# Altium PCB PCB1.PcbDoc
Units mm, origin at the board's own origin, x right, y up, seen from the top; angles counter-clockwise.
Board outline 152.4 x 101.6 mm, 2 copper layers (Top Layer, Bottom Layer); 18 components, 24 nets, 88 pads, 0 vias.
Unrouted connection lines stored in the file: 11.
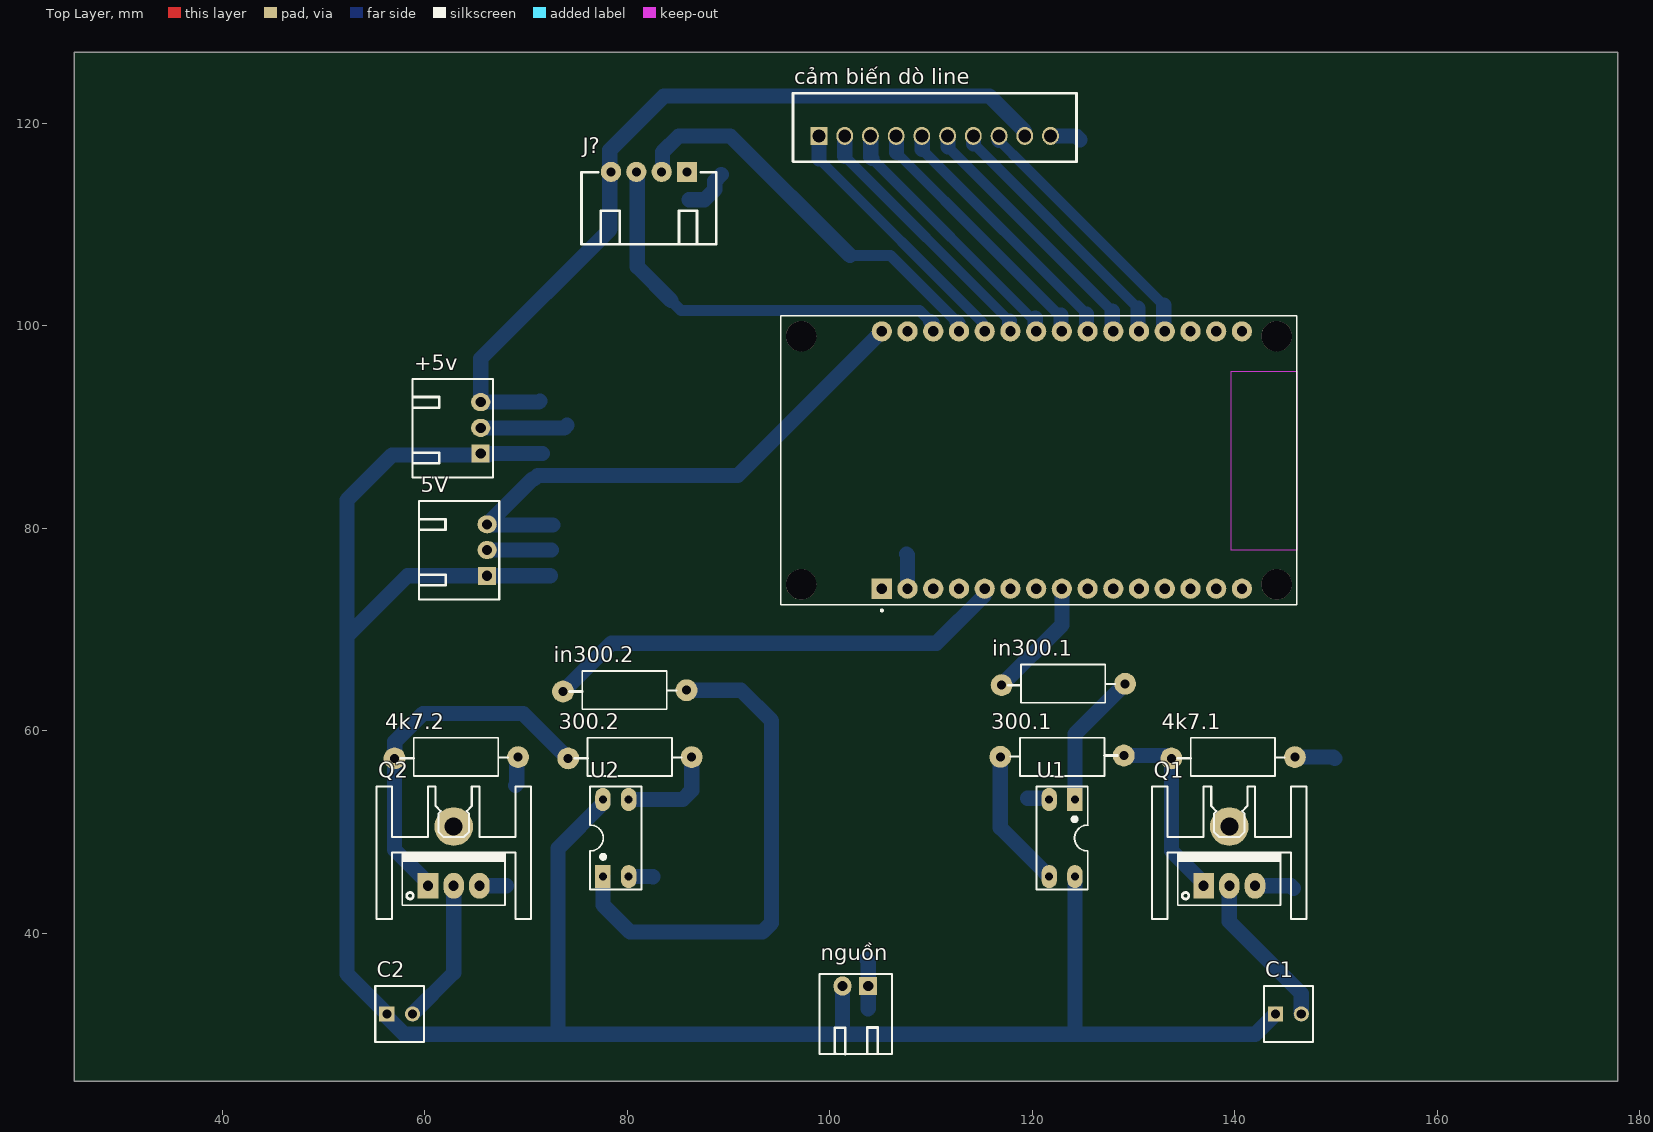
[diagram p0: Top Layer view]
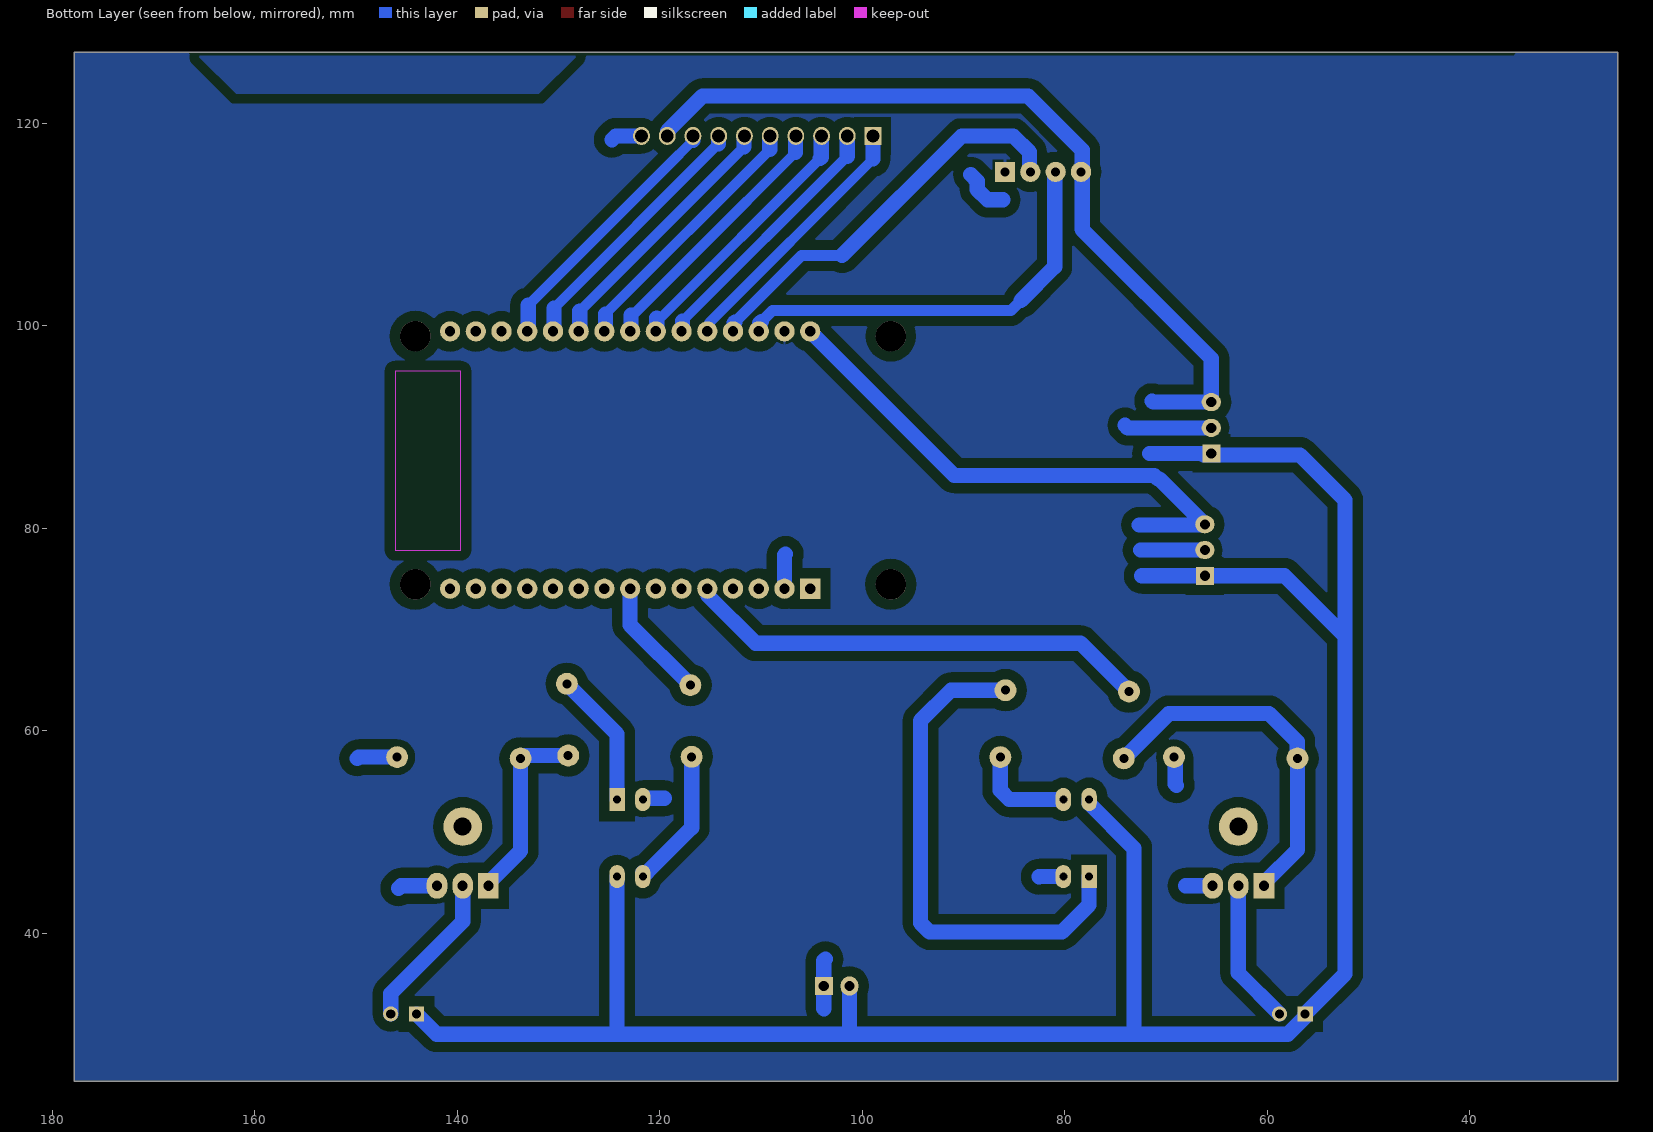
[diagram p1: Bottom Layer view, seen from below]
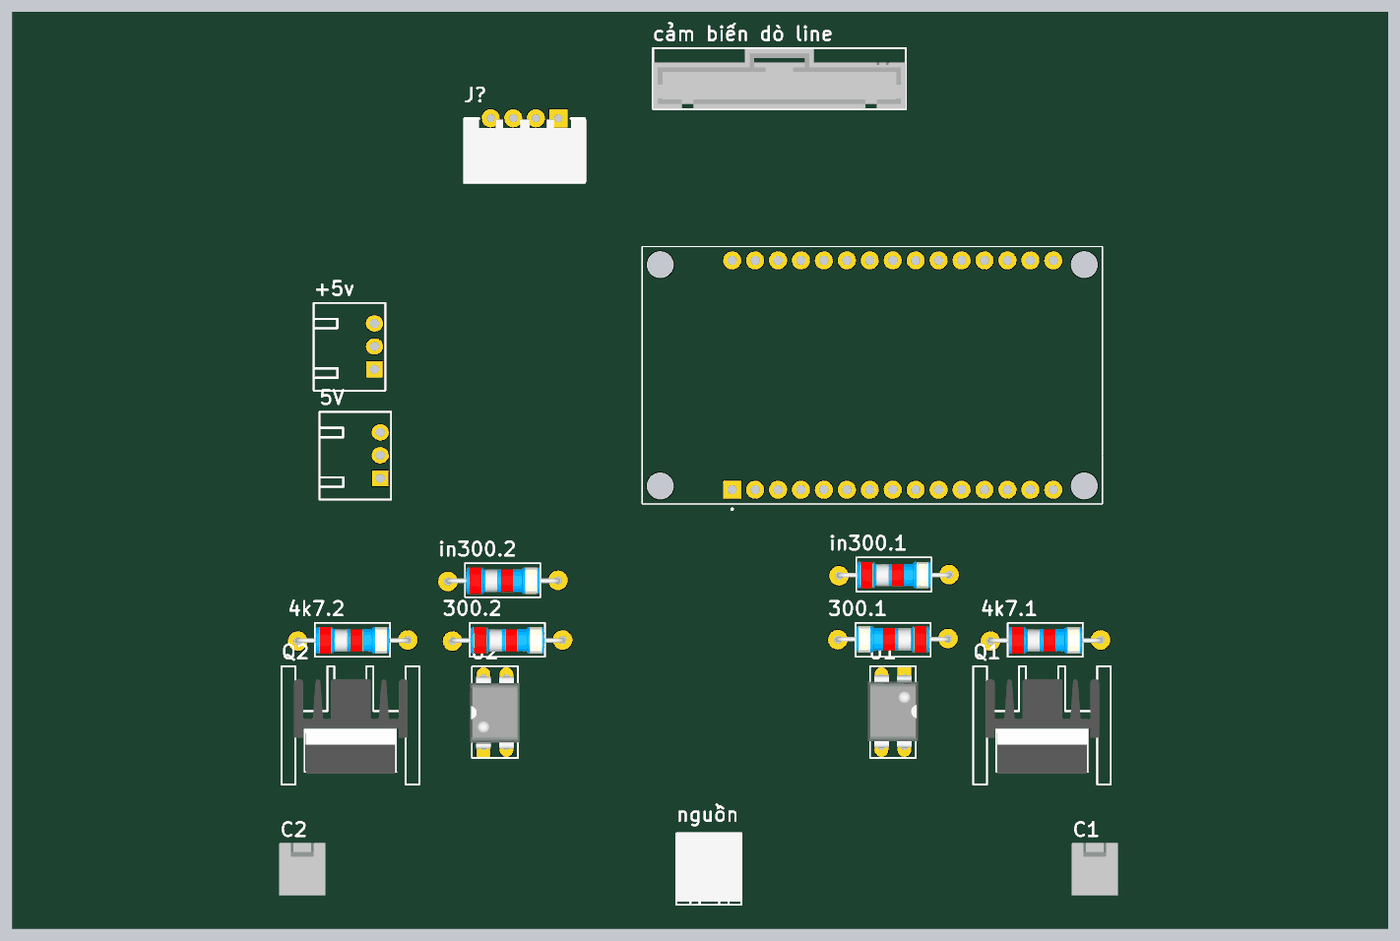
[diagram p2: 3D render of the assembled board from above, using the file's embedded part models]

## Layer stack, top to bottom
Top Solder: solder mask 0.0102, Solder Resist, Dk 3.5
Top Layer: signal copper 0.0356
Dielectric 1: dielectric 0.32, FR-4, Dk 4.8
Bottom Layer: signal copper 0.0356
Bottom Solder: solder mask 0.0102, Solder Resist, Dk 3.5

## Board outline
25.4,25.4 177.8,25.4 177.8,127 25.4,127

## Design rules (kind name [scope] priority, off if disabled: settings)
Clearance [All] p1: gap=1 ignorepadtopadclearanceinfootprint=FALSE
PolygonConnect [All] p1: connectstyle=Relief reliefconductorwidth=0.254 reliefentries=4 polygonreliefangle="90 Angle" airgapwidth=0.254
RoutingVias [All] p1: holewidth=0.711 width=1.27 viastyle="Through Hole" minholewidth=0.711 minwidth=1.27 maxholewidth=0.711 maxwidth=1.27
SolderMaskExpansion [All] p1: expansion=0.102 istentingtop=FALSE
Width [All] p1: maxlimit=2 minlimit=1 preferedwidth=1
30 further rules are at their usual default settings.

## Classes and differential pairs
component class control: 300.1 300.2 C1 C2 "cảm biến dò line" in300.1 in300.2 J? Q1 Q2

## Components (designator, comment, footprint, x,y, rotation, side; value= is the part's Value field where it differs from the comment)
4k7.1 "Res" RES-1/2W 139.319,57.404 r0 top
4k7.2 "Res" RES-1/2W 62.611,57.404 r0 top
5V "L7805cv" "Header_Duc Cong_3P 2.54" 66.167,75.311 r270 top
300.1 "Res" RES-1/2W 123.444,57.434 r180 top
300.2 "Res" RES-1/2W 79.756,57.404 r0 top
+5v "L7805cv" "Header_Duc Cong_3P 2.54" 65.532,87.376 r270 top
C1 "Header2" HDR2 144.018,32.049 r0 top
C2 "Header2" HDR2 56.261,32.049 r0 top
"cảm biến dò line" "Header 1_2.54_10P" "Header_Duc Thang_10P_2.54" 98.933,118.745 r90 top
in300.1 "Res" RES-1/2W 122.555,64.643 r0 top
in300.2 "Res" RES-1/2W 79.248,64.008 r0 top
J? "Header 1_2.54_4P" "Header_Duc Cong_4P 2.54" 85.874,115.164 r270 top
nguồn "Header 1_2.54_2P" "Header_Duc Cong_2P 2.54" 103.796,34.798 r0 top
Q1 "IRF540" TO220H1 139.446,44.704 r0 top value=IRF840
Q2 "IRF540" TO220H1 62.865,44.704 r0 top value=IRF840
U1 "PC817" DIP4 124.206,53.226 r180 top
U2 "PC817" DIP4 77.597,45.606 r0 top
? "ESP32-DEVKIT-V1" MODULE_ESP32_DEVKIT_V1 120.65,86.741 r90 top

## Footprints (in the part's own frame and the unit in brackets; to place one, negate y for a bottom-side part, rotate by r counter-clockwise, add the part's x,y. Pads: shape width x height; smd on the part's side, far side on the other; paste and mask are expansions set on the pad)
DIP4 [mil]
  rect 60x90 hole 31: 1(0,0)
  oval 60x90 hole 31: 2(100,0) 3(100,300) 4(0,300)
  silkscreen extent -50,-50 150,350, body extent -59,-10 159,305, height 170
HDR2 [mm] "Connector; Header; 2 Position"
  rect 1.5x1.5 hole 0.9: 1(0,0)
  round 1.5 hole 0.9: 2(2.54,0)
  silkscreen extent -1.14,-2.79 3.68,2.77, body extent -1.27,-2.92 3.81,2.88, height 11.72
"Header_Duc Cong_2P 2.54" [mil]
  rect 70x70 hole 39.37 unplated: 1(0,0)
  oval 70x75 hole 39.37 unplated: 2(-100,0)
  silkscreen extent -190,-265 93,47, body extent -190,-250 90,50, height 237
"Header_Duc Cong_3P 2.54" [mil]
  rect 70x70 hole 39.37 unplated: 1(0,0)
  oval 70x75 hole 39.37 unplated: 2(-100,0) 3(-200,0)
  silkscreen extent -290,-265 93,47
"Header_Duc Cong_4P 2.54" [mil]
  rect 78.74x78.74 hole 35: 1(-1,1)
  round 78.74 hole 35: 2(-1,-97.42) 3(-1,-195.85) 4(-1,-294.28)
  silkscreen extent 0,-409 280,115, body extent 5,-413 278,123, height 290
"Header_Duc Thang_10P_2.54" [mil]
  rect 70x65 hole 50: 1(0,0)
  oval 70x65 hole 50: 2(0,-100) 3(0,-200) 4(0,-300) 5(0,-400) 6(0,-500) 7(0,-600) 8(0,-700) 9(0,-800) 10(0,-900)
  silkscreen extent -101,-1001 165,101, body extent -98,-1000 162,100, height 550
MODULE_ESP32_DEVKIT_V1 [mm]
  rect 2x2 / inner round 2 / far side rect 2x2 hole 1.02: 1(-12.7,15.515)
  round 2 hole 1.02: 2(-12.7,12.975) 3(-12.7,10.435) 4(-12.7,7.895) 5(-12.7,5.355) 6(-12.7,2.815) 7(-12.7,0.275) 8(-12.7,-2.265) 9(-12.7,-4.805) 10(-12.7,-7.345) 11(-12.7,-9.885) 12(-12.7,-12.425) 13(-12.7,-14.965) 14(-12.7,-17.505) 15(-12.7,-20.045) 16(12.7,-20.045) 17(12.7,-17.505) 18(12.7,-14.965) 19(12.7,-12.425) 20(12.7,-9.885) 21(12.7,-7.345) 22(12.7,-4.805) 23(12.7,-2.265) 24(12.7,0.275) 25(12.7,2.815) 26(12.7,5.355) 27(12.7,7.895) 28(12.7,10.435) 29(12.7,12.975) 30(12.7,15.515)
  round 3 hole 3 unplated: ""(-12.28,23.475) ""(-12.28,-23.475) ""(12.23,23.475) ""(12.23,-23.475)
  Keep-Out Layer region: 8.78,-25.475 -8.91,-25.475 -8.91,-18.985 8.78,-18.985
  Keep-Out Layer region: 8.78,-25.475 -8.91,-25.475 -8.91,-18.985 8.78,-18.985
  silkscreen extent -14.95,-25.48 14.23,25.48
RES-1/2W [mil]
  round 85 hole 35: 1(-220,-5) 2(260,0)
  silkscreen extent -195,-74 221,75, body extent -230,-60 270,56, height 121
TO220H1 [mil] "TO-220 - 1-2-3"
  round 150 hole 70: 0(0,230)
  rect 80x100 hole 39: 1(-100,0)
  oval 80x100 hole 39: 2(0,0) 3(100,0)
  silkscreen extent -300,-130 300,385, body extent -246,-82 250,329, height 1000

## Part data
4k7.1 4k7.2 300.1 300.2 in300.1 in300.2: Manufacturer="Generic Components", Class=Passive, Published=08/06/2000, Publisher="Altium Hobart Technology Centre", SubClass=R
5V +5v: library part "Header 1_2.54_3P", "Cắm", Chung_Loai=Cắm
C1 C2: "Header IDC, 2 x 1 Pin Vertical 2.54mm Pitch (Non-Boxed, Male)", Manufacturer="W¨¹rth Elektronik eiSos GmbH", partNo=613002143121, ComponentLink1 Description=Manufacturer, ComponentLink1URL=http://www.we-online.com, ComponentLink2 Description=Datasheet, ComponentLink2URL=http://katalog.we-online.de/em/datasheet/6130xx143121.pdf, Created by="Karrer Zheng", Created Date="29 March 2013", NoPins=02
"cảm biến dò line" J? nguồn: "Cắm", Chung_Loai=Cắm
  "cảm biến dò line": Don_Vi=Con
Q1 Q2: library part IRF840, "MOSFET N - CHANNEL 500V - 0.75 - 8A - TO-220"
U1 U2: "Single Opto"
?: "Dual core, Wi-Fi: 2.4 GHz up to 150 Mbits/s,BLE (Bluetooth Low Energy) and legacy Bluetooth, 32 bits, Up to 240 MHz", Package=None, Availability="Not in stock", Check_prices=https://www.snapeda.com/parts/ESP32-DEVKIT-V1/Do+it/view-part/?ref=eda, MF="Do it", MP=ESP32-DEVKIT-V1, Price=None, SnapEDA_Link=https://www.snapeda.com/parts/ESP32-DEVKIT-V1/Do+it/view-part/?ref=snap

## Nets (pads, with @x,y where several pads share a name; then routed paths per layer and width w, separated by ;. In a path a pad name is that pad's centre, name@x,y a point inside that pad or via, vN(x,y) a via of type N, cw(c..) or ccw(c..) an arc to the next point about the centre after c; other vN are vias at no path point)
+12: 5V.1 +5v.1 C1.1 C2.1 nguồn.2 U1.4 U2.4 | length 231.8
  Bottom Layer w1: 128.651,30.176 128.778,30.049
  Bottom Layer w1.5: +5v.1 71.628,87.376 ; +5v.1@66.294,87.249 56.769,87.249 52.324,82.804 52.324,69.342 ; 72.39,75.311 5V.1 58.293,75.311 52.324,69.342 ; U2.4 77.597,52.845 73.152,48.4 73.152,30.176 73.025,30.049 ; 101.256,30.226 nguồn.2 ; U1.4 124.206,30.049 ; C1.1 142.018,30.049 128.778,30.049 124.206,30.049 ; 52.324,69.342 52.324,35.986 C2.1 56.261,31.76 57.973,30.049 73.025,30.049 ; 73.025,30.049 124.206,30.049
GND: 4k7.1.2 4k7.2.2 5V.2 "cảm biến dò line.10" +5v.2 ?.29 J?.1 nguồn.1 Q1.3 Q2.3 U1.2 U2.2 | length 41.5
  Bottom Layer w1.5: Q2.3 68.072,44.704 ; +5v.2 73.787,89.916 74.041,90.17 ; 5V.2 72.517,77.851 ; 68.961,54.61 69.089,54.738 69.089,57.278 4k7.2.2 ; U2.2 82.537,45.606 82.55,45.593 ; 103.632,37.465 103.796,37.301 nguồn.1 103.796,32.585 103.759,32.549 ; 119.507,53.34 121.655,53.34 121.666,53.329 U1.2 ; 121.793,118.745 124.333,118.745 124.714,118.364 ; Q1.3@141.986,44.958 Q1.3 145.542,44.704 145.796,44.45 ; 4k7.1.2 149.733,57.404 149.86,57.277
Net4k7.1_1: 4k7.1.1 300.1.1 Q1.1 | length 18.7
  Bottom Layer w1.5: 300.1.1 133.268,57.561 133.553,57.277 4k7.1.1 133.731,48.133 136.906,44.958 Q1.1
Net4k7.2_1: 4k7.2.1 300.2.1 Q2.1 | length 35.7
  Bottom Layer w1.5: Q2.1 60.325,44.958 57.023,48.26 4k7.2.1 57.052,57.306 57.052,58.957 59.817,61.722 69.723,61.722 300.2.1
Net5V_3: 5V.3 ?.30 | length 53.4
  Bottom Layer w1.5: 72.644,80.338 66.22,80.338 5V.3 70.632,84.856 70.8,84.856 71.161,85.217 90.911,85.217 ?.30
"Net220 u.1_2": "cảm biến dò line.9" +5v.3 J?.4 | length 81.2
  Bottom Layer w1.5: 71.394,92.583 71.267,92.456 +5v.3 65.532,96.774 78.279,109.521 78.279,115.189 78.279,117.348 83.613,122.682 115.775,122.682 119.224,119.233 119.224,118.774 119.253,118.745
Net300.1_2: 300.1.2 U1.3 | length 14
  Bottom Layer w1.5: 300.1.2 116.84,50.432 121.28,45.991 121.655,45.991 121.666,45.98 U1.3
Net300.2_2: 300.2.2 U2.3 | length 9.9
  Bottom Layer w1.5: U2.3 85.481,53.226 86.36,54.104 300.2.2
Net_5: ?.5 in300.2.1 | length 46.2
  Bottom Layer w1.5: in300.2.1 78.434,68.655 110.551,68.655 115.199,73.303 115.199,73.945 ?.5
Net_8: ?.8 in300.1.1 | length 12
  Bottom Layer w1.5: in300.1.1 122.915,70.464 ?.8
Net_19: "cảm biến dò line.8" ?.19 | length 26.1
  Bottom Layer w1: 116.713,118.286 119.308,115.691 132.979,102.02
  Bottom Layer w1.5: 116.713,118.286 116.713,118.745 ; 132.979,102.02 132.979,99.537 ?.19
Net_20: "cảm biến dò line.7" ?.20 | length 26.1
  Bottom Layer w1: 114.202,117.969 130.439,101.732
  Bottom Layer w1.5: 114.173,118.745 114.202,118.716 114.202,117.969 ; 130.439,101.732 130.439,99.537 ?.20
Net_21: "cảm biến dò line.6" ?.21 | length 26.1
  Bottom Layer w1: 111.662,117.681 127.899,101.443
  Bottom Layer w1.5: 111.633,118.745 111.662,118.716 111.662,117.681 ; 127.899,101.443 127.899,99.537 ?.21
Net_22: "cảm biến dò line.5" ?.22 | length 26.1
  Bottom Layer w1: 109.122,117.392 125.359,101.155
  Bottom Layer w1.5: 109.093,118.745 109.122,118.716 109.122,117.392 ; 125.359,101.155 125.359,99.537 ?.22
Net_23: "cảm biến dò line.4" ?.23 | length 26.2
  Bottom Layer w1: 106.582,117.104 115.995,107.691 122.642,101.044 122.819,101.044
  Bottom Layer w1.5: 106.553,118.745 106.582,118.716 106.582,117.104 ; 122.819,101.044 122.819,99.537 ?.23
Net_24: "cảm biến dò line.3" ?.24 | length 26.3
  Bottom Layer w1: 104.157,116.524 119.926,100.755 120.279,100.755
  Bottom Layer w1.5: 104.013,118.745 104.042,118.716 104.042,116.639 104.157,116.524 ; 120.279,100.755 120.279,99.537 ?.24
Net_25: "cảm biến dò line.2" ?.25 | length 26.1
  Bottom Layer w1: 101.473,116.733 117.739,100.467
  Bottom Layer w1.5: 101.473,116.733 101.473,118.745 ; 117.739,100.467 117.739,99.537 ?.25
Net_26: "cảm biến dò line.1" ?.26 | length 26.1
  Bottom Layer w1: 98.933,116.459 115.104,100.288 115.104,99.632 ?.26
  Bottom Layer w1.5: 98.933,116.459 98.933,118.745
Net_27: ?.27 J?.2 | length 40.3
  Bottom Layer w1.1: 101.981,106.934 105.983,106.934 ?.27@112.555,100.362
  Bottom Layer w1.5: J?.2 83.495,115.285 83.495,117.15 85.09,118.745 90.17,118.745 101.981,106.934 ; ?.27@112.555,100.362 112.659,100.258 112.659,99.537 ?.27
Net_28: ?.28 J?.3 | length 41.7
  Bottom Layer w1.1: 84.328,102.489 85.296,101.521 108.851,101.521 109.959,100.413
  Bottom Layer w1.5: J?.3 80.995,115.093 80.995,105.822 84.328,102.489 ; 109.959,100.413 110.119,100.252 110.119,99.537 ?.28
NetC1_2: C1.2 Q1.2 | length 15.6
  Bottom Layer w1.5: Q1.2 139.446,41.184 146.558,34.072 C1.2
NetC2_2: C2.2 Q2.2 | length 14.4
  Bottom Layer w1: C2.2 C2.2@58.801,32.098
  Bottom Layer w1.5: C2.2 62.865,36.113 Q2.2
Netin300.1_2: in300.1.2 U1.1 | length 13.5
  Bottom Layer w1.5: U1.1 124.206,59.69 in300.1.2
Netin300.2_2: in300.2.2 U2.1 | length 50.5
  Bottom Layer w1.5: U2.1 77.609,45.594 77.609,42.787 80.264,40.132 93.345,40.132 94.234,41.021 94.234,61.002 91.228,64.008 in300.2.2
pads on no net: ?. ?.1 ?.2 ?.3 ?.4 ?.6 ?.7 ?.9 ?.10 ?.11 ?.12 ?.13 ?.14 ?.15 ?.16 ?.17 ?.18 Q1.0 Q2.0
copper on no net: | length 8.2
  Bottom Layer w1.5: 86.106,112.439 87.624,112.439 88.649,113.464 88.649,114.303 89.281,114.935 ; 107.569,77.47 107.675,77.364 107.675,74.041

## Polygon pours and split planes (outlines as drawn)
GND on Bottom Layer "Bottom Layer-No Net" (solid, pour order 3): 25.502,25.502 177.698,25.502 177.698,126.898 166.343,126.898 166.345,126.873 166.278,126.711 162.087,122.52 161.925,122.453 131.826,122.453 131.664,122.52 127.54,126.644 35.687,126.644 35.46,126.898 25.502,126.898
no net on Bottom Layer "Bottom Layer-No Net 1" (solid, pour order 2): 128.187,126.644 131.921,122.911 161.83,122.911 165.564,126.644